# Altium PCB Pulp FMC Sensor Board_4X512Mbits_HyperRam.PcbDoc (part 2 of 2)
Units mm, origin at the board's own origin, x right, y up, seen from the top; angles counter-clockwise.
Board outline 62.85 x 58.85 mm, 4 copper layers (Top Layer, GND, PWR, Bottom Layer), stack 1.56 mm thick; 27 components, 33 nets, 302 pads, 158 vias.
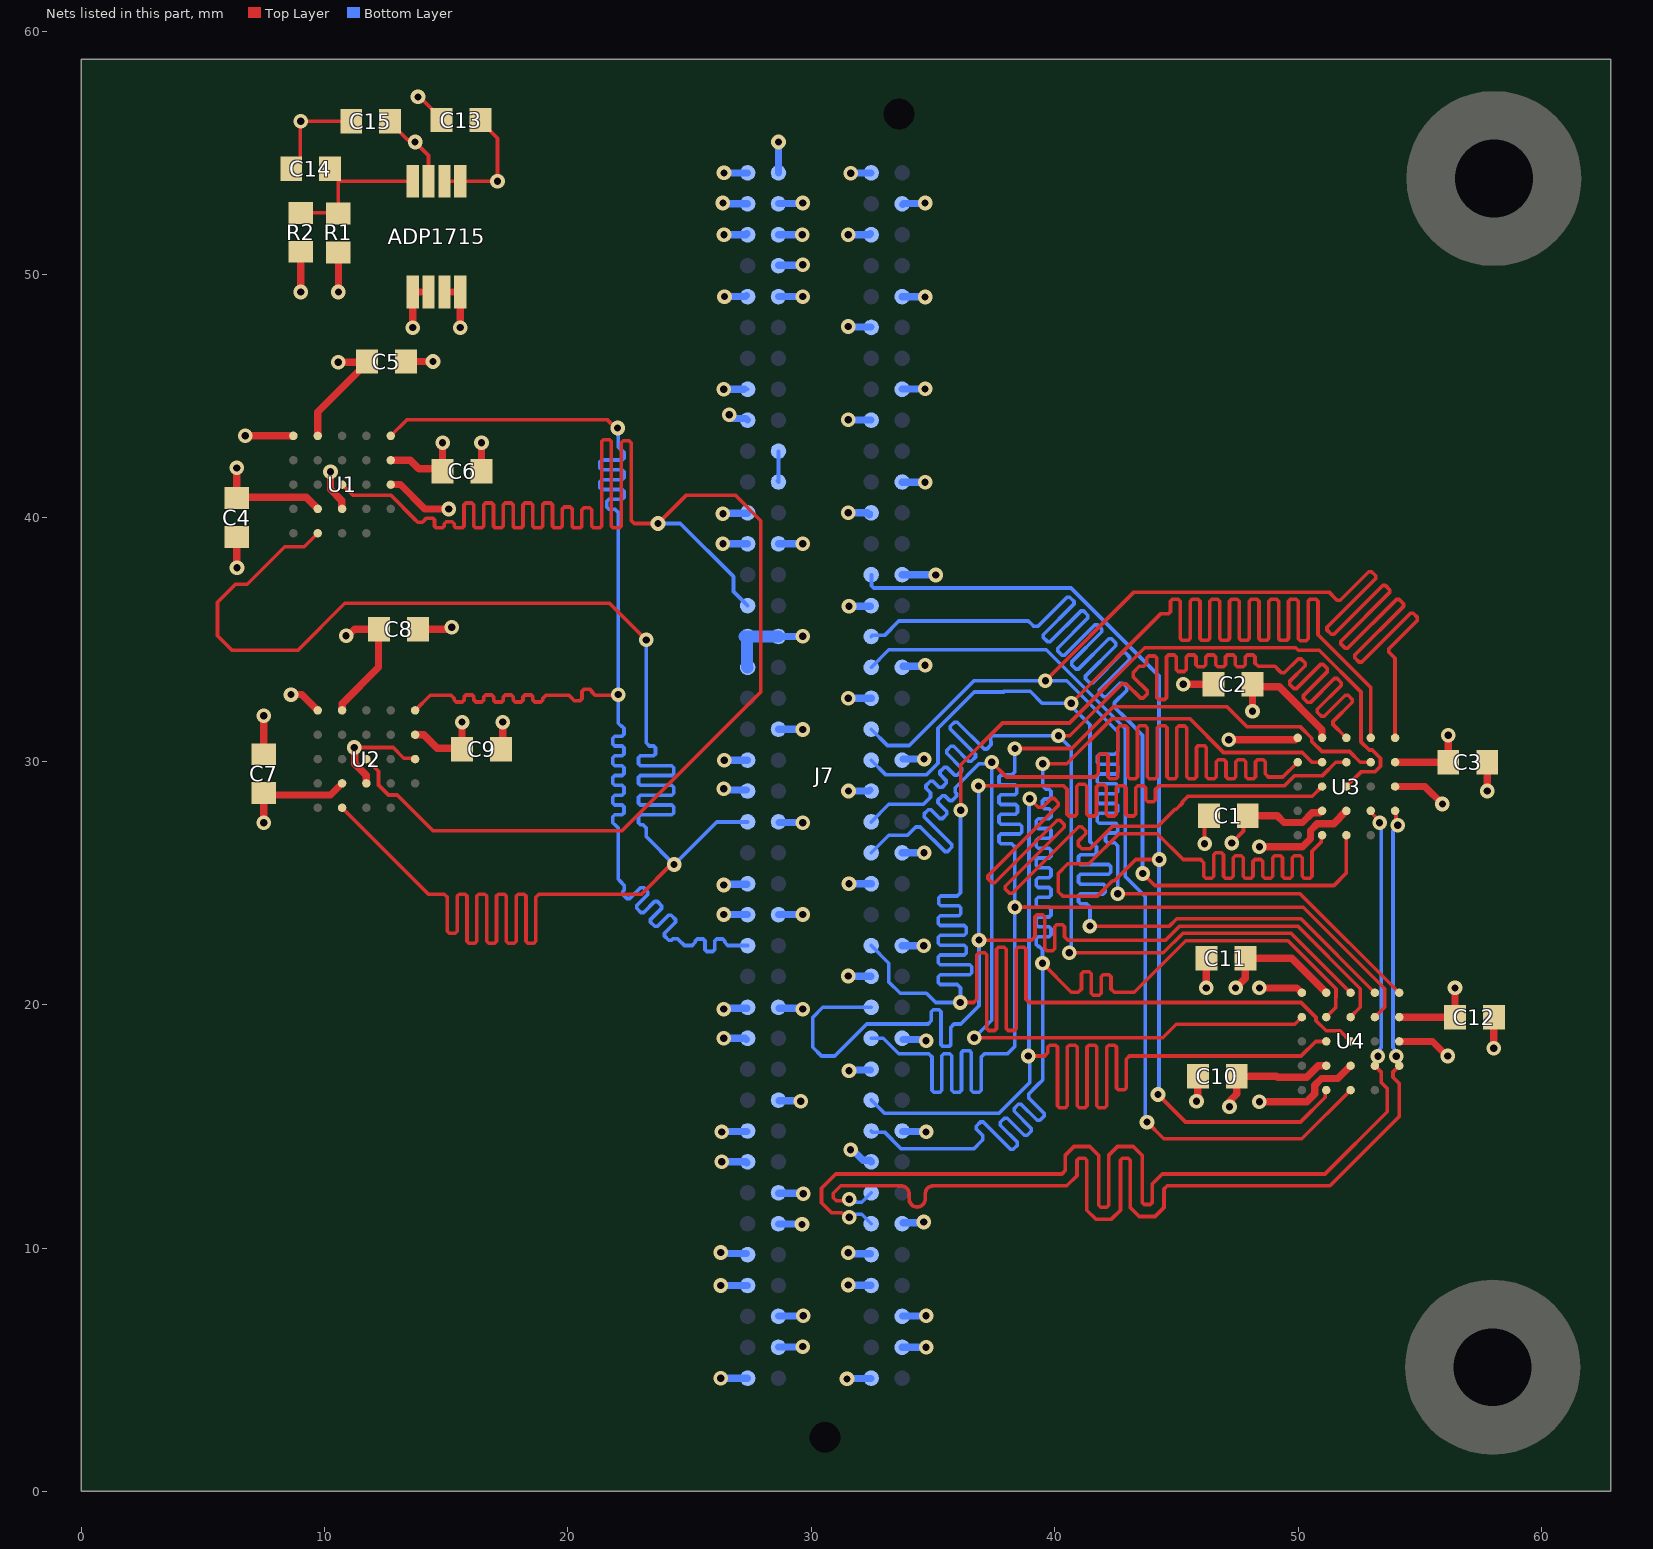
[diagram p4: the nets of this part, all layers, seen from the top]

## Via types
v1: diameter 0.6, hole 0.3, Top Layer to Bottom Layer, tented both sides, 156 vias
v2: diameter 0.6, hole 0.3, Top Layer to Bottom Layer, 2 vias

## Nets (pads, with @x,y where several pads share a name; then routed paths per layer and width w, separated by ;. In a path a pad name is that pad's centre, name@x,y a point inside that pad or via, vN(x,y) a via of type N, cw(c..) or ccw(c..) an arc to the next point about the centre after c; other vN are vias at no path point) (continued)
FMC_HYPER2_D7: J7.C15 U1.E1 U2.E1 | length 59.7
  Top Layer w0.15: U1.E1@12.716,43.375 13.372,44.032 21.628,44.032 21.96,43.7 v1(22.039,43.7) ; U2.E1@13.716,32.093 14.341,32.717 14.716,32.717 15.195,32.717 15.326,32.586 15.326,32.519 15.407,32.438 15.65,32.438 15.73,32.519 15.73,32.648 15.811,32.729 16.054,32.729 16.134,32.648 16.134,32.519 16.215,32.438 16.458,32.438 16.538,32.519 16.538,32.648 16.619,32.729 16.862,32.729 16.942,32.648 16.942,32.519 17.023,32.438 17.266,32.438 17.346,32.519 17.346,32.648 17.427,32.729 17.67,32.729 17.75,32.648 17.75,32.519 17.831,32.438 18.074,32.438 18.154,32.519 18.154,32.648 18.235,32.729 18.478,32.729 18.558,32.648 18.558,32.519 18.639,32.438 18.882,32.438 18.962,32.519 18.962,32.586 19.094,32.717 20.043,32.717 20.174,32.586 20.174,32.575 20.255,32.494 20.498,32.494 20.578,32.575 20.578,32.875 20.659,32.956 20.902,32.956 20.982,32.875 20.982,32.849 21.114,32.717 21.54,32.717 22.039,32.717 v1(22.065,32.743)
  Bottom Layer w0.15: v1(22.039,43.7) 22.065,43.674 22.065,42.992 22.065,42.917 22.197,42.785 22.219,42.785 22.3,42.705 22.3,42.462 22.219,42.381 21.396,42.381 21.315,42.301 21.315,42.058 21.396,41.977 22.219,41.977 22.3,41.897 22.3,41.654 22.219,41.573 21.396,41.573 21.315,41.493 21.315,41.25 21.396,41.169 22.219,41.169 22.3,41.089 22.3,40.846 22.219,40.765 21.68,40.765 21.599,40.685 21.599,40.442 21.68,40.361 21.933,40.361 22.065,40.23 22.065,39.028 v1(22.065,32.743) 22.065,31.965 22.065,31.568 22.197,31.436 22.219,31.436 22.3,31.356 22.3,31.113 22.219,31.032 21.921,31.032 21.84,30.952 21.84,30.709 21.921,30.628 22.219,30.628 22.3,30.548 22.3,30.305 22.219,30.224 21.921,30.224 21.84,30.144 21.84,29.901 21.921,29.82 22.219,29.82 22.3,29.74 22.3,29.497 22.219,29.416 21.921,29.416 21.84,29.336 21.84,29.093 21.921,29.012 22.219,29.012 22.3,28.932 22.3,28.689 22.219,28.608 21.921,28.608 21.84,28.528 21.84,28.285 21.921,28.204 22.219,28.204 22.3,28.124 22.3,27.881 22.219,27.8 21.921,27.8 21.84,27.72 21.84,27.477 21.921,27.396 21.933,27.396 22.065,27.265 22.065,27.19 22.065,25.149 22.135,25.079 22.316,24.898 22.316,24.712 22.251,24.646 22.251,24.532 22.423,24.361 22.537,24.361 22.988,24.812 23.103,24.812 23.274,24.641 23.274,24.527 22.823,24.075 22.823,23.961 22.994,23.789 23.108,23.789 23.56,24.241 23.674,24.241 23.845,24.07 23.845,23.955 23.394,23.504 23.394,23.39 23.565,23.218 23.68,23.218 24.131,23.67 24.245,23.67 24.417,23.498 24.417,23.384 23.965,22.932 23.965,22.818 24.137,22.647 24.251,22.647 24.316,22.712 24.502,22.712 24.556,22.659 24.784,22.43 25.021,22.43 25.096,22.43 25.227,22.562 25.227,22.619 25.308,22.7 25.551,22.7 25.631,22.619 25.631,22.266 25.712,22.185 25.955,22.185 26.035,22.266 26.035,22.619 26.116,22.7 26.359,22.7 26.439,22.619 26.439,22.562 26.571,22.43 26.8,22.43 J7.C15@27.38,22.43
FMC_HYPER2_RESET: J7.C19 U1.A4 U2.A4 | length 82.6
  Top Layer w0.15: U1.A4@9.716,39.375 9.158,38.817 8.366,38.817 6.823,37.275 6.337,37.275 5.596,36.534 5.596,35.165 6.202,34.559 8.89,34.559 10.832,36.5 21.703,36.5 v1(23.215,34.989) ; U2.A4@10.716,28.093 14.265,24.544 14.772,24.544 14.912,24.544 15.044,24.412 15.044,23.016 15.125,22.935 15.367,22.935 15.448,23.016 15.448,24.463 15.529,24.544 15.771,24.544 15.852,24.463 15.852,22.604 15.933,22.523 16.175,22.523 16.256,22.604 16.256,24.463 16.337,24.544 16.579,24.544 16.66,24.463 16.66,22.604 16.741,22.523 16.983,22.523 17.064,22.604 17.064,24.463 17.145,24.544 17.387,24.544 17.468,24.463 17.468,22.604 17.549,22.523 17.791,22.523 17.872,22.604 17.872,24.463 17.953,24.544 18.195,24.544 18.276,24.463 18.276,22.604 18.357,22.523 18.599,22.523 18.68,22.604 18.68,24.412 18.812,24.544 18.887,24.544 23.019,24.544 24.238,25.763 v1(24.36,25.763)
  Bottom Layer w0.15: v1(23.215,34.989) 23.215,30.89 23.215,30.76 23.347,30.628 23.517,30.628 23.597,30.548 23.597,30.305 23.517,30.224 22.981,30.224 22.9,30.144 22.9,29.901 22.981,29.82 24.265,29.82 24.346,29.74 24.346,29.497 24.265,29.416 22.981,29.416 22.9,29.336 22.9,29.093 22.981,29.012 24.265,29.012 24.346,28.932 24.346,28.689 24.265,28.608 22.981,28.608 22.9,28.528 22.9,28.285 22.981,28.204 24.265,28.204 24.346,28.124 24.346,27.881 24.265,27.8 22.981,27.8 22.9,27.72 22.9,27.477 22.981,27.396 23.083,27.396 23.215,27.265 23.215,27.19 23.215,26.908 v1(24.36,25.763) 24.362,25.763 26.11,27.51 J7.C19@27.38,27.51
FMC_HYPER2_RWDS: J7.C26 U1.C3 U2.C3 | length 78.1
  Top Layer w0.15: U1.C3@10.716,41.375 11.15,40.941 12.716,40.941 13.716,39.941 13.832,39.825 14.018,39.825 14.19,39.996 14.432,39.996 14.513,39.915 14.513,39.673 14.594,39.592 14.836,39.592 14.917,39.673 14.917,39.765 14.998,39.846 15.24,39.846 15.321,39.765 15.321,39.673 15.402,39.592 15.644,39.592 15.725,39.673 15.725,40.533 15.806,40.614 16.048,40.614 16.129,40.533 16.129,39.673 16.21,39.592 16.452,39.592 16.533,39.673 16.533,40.533 16.614,40.614 16.856,40.614 16.937,40.533 16.937,39.673 17.018,39.592 17.26,39.592 17.341,39.673 17.341,40.533 17.422,40.614 17.664,40.614 17.745,40.533 17.745,39.673 17.826,39.592 18.068,39.592 18.149,39.673 18.149,40.533 18.23,40.614 18.472,40.614 18.553,40.533 18.553,39.673 18.634,39.592 18.876,39.592 18.957,39.673 18.957,40.533 19.038,40.614 19.28,40.614 19.361,40.533 19.361,39.673 19.442,39.592 19.684,39.592 19.765,39.673 19.765,40.374 19.846,40.454 20.088,40.454 20.169,40.374 20.169,39.673 20.25,39.592 20.492,39.592 20.573,39.673 20.573,40.335 20.654,40.416 20.896,40.416 20.977,40.335 20.977,39.673 21.058,39.592 21.3,39.592 21.381,39.673 21.381,43.131 21.462,43.212 21.704,43.212 21.785,43.131 21.785,39.673 21.866,39.592 22.108,39.592 22.189,39.673 22.189,43.094 22.27,43.175 22.512,43.175 22.593,43.094 22.593,39.907 22.725,39.775 23.215,39.775 v1(23.7,39.775) 24.866,40.941 26.871,40.941 27.925,39.887 27.925,32.851 22.224,27.15 14.456,27.15 12.988,28.618 12.625,28.618 12.216,29.027 12.216,29.593 U2.C3@11.716,30.093
  Bottom Layer w0.15: v1(23.7,39.775) 24.616,39.775 26.8,37.591 26.8,36.98 J7.C26@27.38,36.4
FMC_HYPER_CK_N: J7.G7 U3.B1 U4.B1 | length 49.2
  Top Layer w0.15: v1(31.555,12.01) 31.483,11.938 31.03,11.938 30.906,12.062 30.906,12.256 31.204,12.554 32.959,12.554 33.692,12.554 cw(c33.692,12.225) 34.021,12.225 34.021,12.016 ccw(c34.35,12.016) 34.35,11.687 ccw(c34.35,12.016) 34.679,12.016 34.679,12.225 cw(c35.008,12.225) 35.008,12.554 36.35,12.554 40.079,12.554 40.5,12.554 40.919,12.972 40.919,13.603 41,13.684 41.242,13.684 41.323,13.603 41.323,11.556 41.69,11.189 42.338,11.189 42.706,11.556 42.706,13.603 42.787,13.684 43.029,13.684 43.11,13.603 43.11,11.666 43.477,11.298 44.125,11.298 44.493,11.666 44.493,12.422 44.625,12.554 47.39,12.554 51.311,12.554 54.159,15.403 54.159,16.759 53.904,17.014 53.904,17.234 U4.B1@54.159,17.489 54.121,17.527 54.121,17.668 54.034,17.755 v1(54.034,17.877) ; U3.B1@53.988,27.965 54.026,27.927 54.026,27.439 v1(54.095,27.371)
  Bottom Layer w0.15: v1(31.555,12.01) 31.67,12.01 31.8,11.88 32.07,11.88 J7.G7@32.46,12.27 ; v1(54.034,17.877) 53.948,17.963 53.948,18.189 53.904,18.234 53.904,27.144 54.095,27.334 v1(54.095,27.371)
FMC_HYPER_CK_P: J7.G6 U3.B2 U4.B2 | length 48.9
  Top Layer w0.15: v1(31.555,11.26) 31.434,11.26 31.245,11.448 30.828,11.448 30.417,11.859 30.417,12.459 31.001,13.043 40.079,13.043 40.298,13.043 40.429,13.175 40.429,13.806 40.797,14.174 41.445,14.174 41.812,13.806 41.812,11.759 41.893,11.678 42.136,11.678 42.216,11.759 42.216,13.806 42.584,14.174 43.232,14.174 43.599,13.806 43.599,11.868 43.68,11.788 43.922,11.788 44.003,11.868 44.003,12.625 44.422,13.043 47.39,13.043 51.108,13.043 53.67,15.605 53.67,16.556 53.414,16.811 53.414,17.234 U4.B2@53.159,17.489 53.197,17.527 53.197,17.668 53.284,17.755 v1(53.284,17.877) ; U3.B2@52.988,27.965 52.988,27.911 53.352,27.547 v1(53.352,27.473)
  Bottom Layer w0.15: v1(31.555,11.26) 31.67,11.26 31.8,11.39 32.07,11.39 J7.G6@32.46,11 ; v1(53.284,17.877) 53.37,17.963 53.37,18.189 53.414,18.234 53.414,27.41 v1(53.352,27.473)
FMC_HYPER_CSN0: J7.G24 U4.A3 | length 38.1
  Top Layer w0.15: v1(43.795,15.177) 44.482,14.489 50.159,14.489 U4.A3@52.159,16.489
  Bottom Layer w0.15: J7.G24@32.46,33.86 33.185,34.585 39.652,34.585 42.898,31.339 42.898,25.264 43.721,24.442 43.721,21.949 43.721,16.759 43.721,15.251 v1(43.795,15.177)
FMC_HYPER_CSN1: J7.G25 U3.A3 | length 49.3
  Top Layer w0.15: v1(43.614,25.39) 44.108,24.897 51.476,24.897 51.988,25.409 U3.A3@51.988,26.965
  Bottom Layer w0.15: J7.G25@32.46,35.13 32.506,35.176 33.005,35.176 33.597,35.767 38.918,35.767 39.076,35.61 39.129,35.557 39.315,35.557 40.507,36.749 40.622,36.749 40.793,36.577 40.793,36.463 39.536,35.206 39.536,35.092 39.707,34.92 39.822,34.92 41.079,36.177 41.193,36.177 41.364,36.006 41.364,35.892 40.124,34.651 40.124,34.537 40.295,34.366 40.41,34.366 41.65,35.606 41.764,35.606 41.936,35.435 41.936,35.32 40.695,34.08 40.695,33.966 40.867,33.794 40.981,33.794 42.221,35.035 42.336,35.035 42.507,34.863 42.507,34.749 41.267,33.509 41.267,33.394 41.438,33.223 41.552,33.223 42.793,34.463 42.907,34.463 43.078,34.292 43.078,34.178 41.838,32.937 41.838,32.823 42.009,32.651 42.124,32.651 42.684,33.212 42.798,33.212 42.969,33.04 42.969,32.926 42.458,32.414 42.458,32.228 42.928,31.757 43.611,31.075 43.611,25.393 v1(43.614,25.39)
FMC_HYPER_D0: J7.G13 U3.D3 U4.D3 | length 71.3
  Top Layer w0.15: v1(36.866,28.99) 39.897,28.99 40.376,28.99 40.508,28.858 40.508,27.837 40.589,27.756 40.831,27.756 40.912,27.837 40.912,28.973 40.993,29.054 41.235,29.054 41.316,28.973 41.316,27.837 41.397,27.756 41.639,27.756 41.72,27.837 41.72,28.95 41.801,29.031 42.043,29.031 42.124,28.95 42.124,27.837 42.205,27.756 42.447,27.756 42.528,27.837 42.528,28.909 42.609,28.99 42.851,28.99 42.932,28.909 42.932,27.837 43.013,27.756 43.255,27.756 43.336,27.837 43.336,28.909 43.417,28.99 43.659,28.99 43.74,28.909 43.74,28.418 43.821,28.337 44.063,28.337 44.144,28.418 44.144,28.858 44.276,28.99 45.264,28.99 49.437,28.99 49.862,29.415 51.004,29.415 51.554,29.965 U3.D3@51.988,29.965 ; v1(36.89,22.655) 38.984,22.655 39.059,22.655 39.19,22.786 39.19,23.619 39.271,23.7 39.514,23.7 39.594,23.619 39.594,22.304 39.675,22.223 39.918,22.223 39.998,22.304 39.998,23.204 40.079,23.284 40.322,23.284 40.402,23.204 40.402,22.786 40.534,22.655 41.092,22.655 44.564,22.655 45.139,23.23 49.984,23.23 52.559,20.655 52.559,19.889 U4.D3@52.159,19.489
  Bottom Layer w0.15: J7.G13@32.46,19.89 30.472,19.89 30.055,19.473 30.055,18.251 30.417,17.889 30.958,17.889 32.277,19.208 34.721,19.208 34.796,19.208 34.928,19.34 34.928,19.708 35.008,19.789 35.251,19.789 35.332,19.708 35.332,18.366 35.412,18.285 35.655,18.285 35.736,18.366 35.736,19.076 35.868,19.208 36.142,19.208 36.89,19.956 v1(36.89,22.655) 36.878,22.667 36.878,28.978 v1(36.866,28.99)
FMC_HYPER_D1: J7.G12 U3.D2 U4.D2 | length 67.3
  Top Layer w0.15: v1(38.366,24) 38.747,24 ccw(c38.747,24.015) 38.763,24.015 cw(c38.779,24.015) 38.795,24.015 ccw(c38.811,24.015) 38.811,24 50.214,24 53.559,20.655 53.559,19.889 U4.D2@53.159,19.489 ; v1(38.366,30.525) 40.7,30.525 42.418,32.244 47.083,32.244 47.912,31.415 50.104,31.415 50.57,30.949 50.57,30.817 50.986,30.401 52.117,30.401 52.554,29.965 U3.D2@52.988,29.965
  Bottom Layer w0.15: J7.G12@32.46,18.62 32.959,18.62 33.594,17.985 34.35,17.985 34.829,17.985 34.961,17.853 34.961,16.478 35.042,16.398 35.284,16.398 35.365,16.478 35.365,17.904 35.446,17.985 35.688,17.985 35.769,17.904 35.769,16.478 35.85,16.398 36.092,16.398 36.173,16.478 36.173,18.032 36.254,18.113 36.496,18.113 36.577,18.032 36.577,16.478 36.658,16.398 36.9,16.398 36.981,16.478 36.981,17.853 37.113,17.985 37.839,17.985 38.061,17.985 38.366,18.29 v1(38.366,24) 38.366,26.404 38.366,26.479 38.235,26.61 37.796,26.61 37.715,26.691 37.715,26.934 37.796,27.014 38.565,27.014 38.646,27.095 38.646,27.338 38.565,27.418 37.796,27.418 37.715,27.499 37.715,27.742 37.796,27.822 38.389,27.822 38.47,27.903 38.47,28.146 38.389,28.226 37.796,28.226 37.715,28.307 37.715,28.55 37.796,28.63 38.368,28.63 38.449,28.711 38.449,28.954 38.368,29.034 37.796,29.034 37.715,29.115 37.715,29.358 37.796,29.438 38.235,29.438 38.366,29.57 38.366,29.706 v1(38.366,30.525)
FMC_HYPER_D2: J7.G10 U3.C4 U4.C4 | length 80
  Top Layer w0.15: v1(38.918,17.889) 39.507,17.889 39.582,17.889 39.714,18.021 39.714,18.257 39.795,18.338 40.037,18.338 40.118,18.257 40.118,15.843 40.199,15.762 40.441,15.762 40.522,15.843 40.522,18.257 40.603,18.338 40.845,18.338 40.926,18.257 40.926,15.843 41.007,15.762 41.249,15.762 41.33,15.843 41.33,18.257 41.411,18.338 41.653,18.338 41.734,18.257 41.734,15.843 41.815,15.762 42.057,15.762 42.138,15.843 42.138,18.257 42.219,18.338 42.461,18.338 42.542,18.257 42.542,16.58 42.623,16.499 42.865,16.499 42.946,16.58 42.946,17.757 43.078,17.889 43.75,17.889 50.125,17.889 50.725,18.489 U4.C4@51.159,18.489 ; v1(38.974,28.465) 39.269,28.17 39.322,28.117 39.508,28.117 39.865,28.474 39.979,28.474 40.151,28.302 40.151,28.188 37.257,25.294 37.257,25.18 37.429,25.009 37.543,25.009 40.108,27.574 40.222,27.574 40.394,27.403 40.394,27.288 37.973,24.867 37.973,24.753 38.144,24.582 38.259,24.582 40.992,27.315 41.106,27.315 41.278,27.144 41.278,27.03 40.976,26.728 40.976,26.541 41.108,26.41 41.284,26.41 41.45,26.41 42.372,27.332 44.246,27.332 44.949,28.035 44.995,28.035 45.252,28.292 45.252,28.338 45.479,28.565 50.588,28.565 U3.C4@50.988,28.965
  Bottom Layer w0.15: J7.G10@32.46,16.08 33.005,15.535 37.71,15.535 38.974,16.799 38.974,17.833 v1(38.918,17.889) 38.946,17.917 38.946,28.437 v1(38.974,28.465)
FMC_HYPER_D3: J7.G9 U3.D4 U4.D4 | length 67.8
  Top Layer w0.15: v1(39.501,21.698) 40.687,20.512 40.895,20.512 40.97,20.512 41.102,20.644 41.102,21.273 41.183,21.354 41.425,21.354 41.506,21.273 41.506,20.47 41.587,20.389 41.829,20.389 41.91,20.47 41.91,21.153 41.991,21.234 42.233,21.234 42.314,21.153 42.314,20.644 42.446,20.512 43.27,20.512 45.388,22.63 49.584,22.63 51.559,20.655 51.559,20.299 51.556,20.296 51.556,19.886 U4.D4@51.159,19.489 ; v1(39.507,29.899) 40.498,29.899 42.356,31.757 45.548,31.757 46.94,30.365 50.178,30.365 50.578,29.965 U3.D4@50.988,29.965
  Bottom Layer w0.15: J7.G9@32.46,14.81 32.506,14.764 33.005,14.764 33.684,14.085 36.684,14.085 36.988,14.389 37.041,14.442 37.041,14.629 36.778,14.892 36.778,15.006 36.949,15.178 37.063,15.178 38.184,14.058 38.298,14.058 38.469,14.229 38.469,14.343 37.763,15.05 37.763,15.164 37.934,15.335 38.049,15.335 38.755,14.629 38.869,14.629 39.041,14.8 39.041,14.915 38.334,15.621 38.334,15.735 38.506,15.907 38.62,15.907 39.279,15.247 39.394,15.247 39.565,15.419 39.565,15.533 38.942,16.156 38.942,16.343 39.279,16.68 39.507,16.908 39.507,21.691 v1(39.501,21.698) 39.501,22.185 39.501,22.26 39.369,22.392 39.327,22.392 39.246,22.473 39.246,22.715 39.327,22.796 39.77,22.796 39.851,22.877 39.851,23.119 39.77,23.2 39.327,23.2 39.246,23.281 39.246,23.523 39.327,23.604 39.77,23.604 39.851,23.685 39.851,23.927 39.77,24.008 39.327,24.008 39.246,24.089 39.246,24.331 39.327,24.412 39.77,24.412 39.851,24.493 39.851,24.735 39.77,24.816 39.327,24.816 39.246,24.897 39.246,25.139 39.327,25.22 39.77,25.22 39.851,25.301 39.851,25.543 39.77,25.624 39.327,25.624 39.246,25.705 39.246,25.947 39.327,26.028 39.77,26.028 39.851,26.109 39.851,26.351 39.77,26.432 39.327,26.432 39.246,26.513 39.246,26.755 39.327,26.836 39.77,26.836 39.851,26.917 39.851,27.159 39.77,27.24 39.327,27.24 39.246,27.321 39.246,27.563 39.327,27.644 39.77,27.644 39.851,27.725 39.851,27.967 39.77,28.048 39.58,28.048 39.499,28.129 39.499,28.371 39.58,28.452 39.77,28.452 39.851,28.533 39.851,28.775 39.77,28.856 39.639,28.856 39.507,28.988 39.507,29.004 39.507,29.079 v1(39.507,29.899)
FMC_HYPER_D4: J7.G18 U3.D5 U4.D5 | length 74.7
  Top Layer w0.15: v1(36.696,18.638) 44.439,18.638 44.996,19.194 49.864,19.194 U4.D5@50.159,19.489 ; v1(37.415,29.965) 37.415,29.964 38.025,29.354 41.222,29.354 41.658,29.354 41.79,29.486 41.79,30.227 41.871,30.307 42.113,30.307 42.194,30.227 42.194,29.371 42.275,29.29 42.517,29.29 42.598,29.371 42.598,31.376 42.679,31.457 42.921,31.457 43.002,31.376 43.002,29.371 43.083,29.29 43.325,29.29 43.406,29.371 43.406,31.376 43.487,31.457 43.729,31.457 43.81,31.376 43.81,29.371 43.891,29.29 44.133,29.29 44.214,29.371 44.214,31.376 44.295,31.457 44.537,31.457 44.618,31.376 44.618,29.371 44.699,29.29 44.941,29.29 45.022,29.371 45.022,31.374 45.103,31.454 45.345,31.454 45.426,31.374 45.426,29.371 45.507,29.29 45.749,29.29 45.83,29.371 45.83,30.566 45.911,30.646 46.153,30.646 46.234,30.566 46.234,29.371 46.315,29.29 46.557,29.29 46.638,29.371 46.638,29.984 46.719,30.065 46.961,30.065 47.042,29.984 47.042,29.371 47.123,29.29 47.365,29.29 47.446,29.371 47.446,29.984 47.527,30.065 47.769,30.065 47.85,29.984 47.85,29.371 47.931,29.29 48.173,29.29 48.254,29.371 48.254,29.984 48.335,30.065 48.577,30.065 48.658,29.984 48.658,29.486 48.79,29.354 49.377,29.354 49.945,29.922 U3.D5@49.988,29.965
  Bottom Layer w0.15: J7.G18@32.46,26.24 33.185,26.965 33.956,26.965 34.294,27.304 34.481,27.304 35.49,26.294 35.605,26.294 35.776,26.465 35.776,26.58 34.634,27.722 34.634,27.836 34.805,28.008 34.92,28.008 35.275,27.653 35.389,27.653 35.56,27.824 35.56,27.938 35.205,28.293 35.205,28.408 35.377,28.579 35.491,28.579 35.682,28.388 35.796,28.388 35.967,28.56 35.967,28.674 35.909,28.732 35.909,28.918 36.873,29.882 36.89,29.899 37.349,29.899 v1(37.415,29.965) 37.415,19.357 v1(36.696,18.638)
FMC_HYPER_D5: J7.G19 U3.E3 U4.E3 | length 71.8
  Top Layer w0.15: v1(40.155,31.05) 40.625,31.05 40.705,31.13 42.758,33.182 42.944,33.182 43.525,32.601 43.639,32.601 43.811,32.772 43.811,32.887 43.23,33.468 43.23,33.654 43.478,33.903 43.581,33.903 43.656,33.903 43.788,34.034 43.788,34.251 43.869,34.331 44.111,34.331 44.192,34.251 44.192,32.625 44.273,32.544 44.515,32.544 44.596,32.625 44.596,34.29 44.677,34.37 44.919,34.37 45,34.29 45,33.771 45.081,33.69 45.323,33.69 45.404,33.771 45.404,34.29 45.485,34.37 45.727,34.37 45.808,34.29 45.808,33.971 45.889,33.89 46.131,33.89 46.212,33.971 46.212,34.29 46.293,34.37 46.535,34.37 46.616,34.29 46.616,33.971 46.697,33.89 46.939,33.89 47.02,33.971 47.02,34.29 47.101,34.37 47.343,34.37 47.424,34.29 47.424,33.971 47.505,33.89 47.747,33.89 47.828,33.971 47.828,34.29 47.909,34.37 48.151,34.37 48.232,34.29 48.232,34.034 48.364,33.903 48.83,33.903 49.05,33.903 49.263,33.69 49.316,33.637 49.44,33.637 50.012,34.209 50.126,34.209 50.298,34.037 50.298,33.923 49.654,33.279 49.654,33.165 49.825,32.993 49.939,32.993 50.923,33.977 51.038,33.977 51.209,33.806 51.209,33.692 50.225,32.708 50.225,32.594 50.396,32.422 50.511,32.422 51.495,33.406 51.609,33.406 51.78,33.235 51.78,33.12 50.796,32.136 50.796,32.022 50.968,31.851 51.082,31.851 51.945,32.714 52.059,32.714 52.231,32.542 52.231,32.428 51.44,31.637 51.44,31.513 51.944,31.009 U3.E3@51.988,30.965 ; v1(40.6,22.13) 44.464,22.13 45.264,22.93 49.719,22.93 U4.E3@52.159,20.489
  Bottom Layer w0.15: J7.G19@32.46,27.51 33.185,28.235 34.608,28.235 34.845,28.472 34.898,28.525 34.898,28.711 34.715,28.894 34.715,29.008 34.886,29.18 35.001,29.18 35.252,28.928 35.366,28.928 35.538,29.1 35.538,29.214 35.286,29.465 35.286,29.58 35.458,29.751 35.572,29.751 35.888,29.435 36.002,29.435 36.173,29.607 36.173,29.721 35.562,30.332 35.562,30.446 35.734,30.618 35.848,30.618 36.459,30.007 36.573,30.007 36.745,30.178 36.745,30.292 35.712,31.325 35.712,31.44 35.883,31.611 35.997,31.611 37.101,30.508 37.215,30.508 37.387,30.679 37.387,30.793 37.37,30.81 37.37,30.996 37.423,31.05 v1(40.155,31.05) 40.68,30.525 40.68,22.21 v1(40.6,22.13)
FMC_HYPER_D6: J7.G21 U3.E2 U4.E2 | length 80.1
  Top Layer w0.15: v1(40.68,32.39) 44.349,36.059 44.596,36.059 44.671,36.059 44.759,36.146 44.759,36.575 44.84,36.655 45.082,36.655 45.163,36.575 45.163,35.051 45.244,34.97 45.486,34.97 45.567,35.051 45.567,36.575 45.648,36.655 45.89,36.655 45.971,36.575 45.971,35.051 46.052,34.97 46.294,34.97 46.375,35.051 46.375,36.575 46.456,36.655 46.698,36.655 46.779,36.575 46.779,35.051 46.86,34.97 47.102,34.97 47.183,35.051 47.183,36.575 47.264,36.655 47.506,36.655 47.587,36.575 47.587,35.051 47.668,34.97 47.91,34.97 47.991,35.051 47.991,36.575 48.072,36.655 48.314,36.655 48.395,36.575 48.395,35.051 48.476,34.97 48.718,34.97 48.799,35.051 48.799,36.575 48.88,36.655 49.122,36.655 49.203,36.575 49.203,35.051 49.284,34.97 49.526,34.97 49.607,35.051 49.607,36.575 49.688,36.655 49.93,36.655 50.011,36.575 50.011,35.033 50.092,34.952 50.334,34.952 50.415,35.033 50.415,36.575 50.496,36.655 50.738,36.655 50.819,36.575 50.819,35.206 50.937,35.088 52.988,33.037 U3.E2@52.988,30.965 ; v1(41.45,23.23) 44.715,23.23 45.015,23.53 50.119,23.53 U4.E2@53.159,20.489
  Bottom Layer w0.15: J7.G21@32.46,30.05 33.067,29.443 34.726,29.443 35.205,29.923 35.205,31.358 36.699,32.851 37.896,32.851 37.919,32.875 38.999,32.875 39.484,32.39 v1(40.68,32.39) 40.68,32.268 41.45,31.498 41.45,27.756 41.45,26.703 41.582,26.571 41.638,26.571 41.719,26.49 41.719,26.248 41.638,26.167 41.061,26.167 40.98,26.086 40.98,25.844 41.061,25.763 42.217,25.763 42.298,25.682 42.298,25.44 42.217,25.359 41.061,25.359 40.98,25.278 40.98,25.036 41.061,24.955 41.992,24.955 42.073,24.874 42.073,24.632 41.992,24.551 41.061,24.551 40.98,24.47 40.98,24.228 41.061,24.147 41.318,24.147 41.45,24.015 41.45,23.94 v1(41.45,23.23)
FMC_HYPER_D7: J7.G22 U3.E1 U4.E1 | length 80.2
  Top Layer w0.15: v1(39.62,33.315) 43.26,36.955 51.271,36.955 51.554,36.673 51.607,36.62 51.731,36.62 52.906,37.796 53.021,37.796 53.192,37.624 53.192,37.51 51.192,35.51 51.192,35.396 51.364,35.225 51.478,35.225 53.478,37.224 53.592,37.224 53.763,37.053 53.763,36.939 51.764,34.939 51.764,34.825 51.935,34.653 52.049,34.653 54.049,36.653 54.163,36.653 54.335,36.482 54.335,36.367 52.335,34.368 52.335,34.253 52.506,34.082 52.621,34.082 54.62,36.082 54.735,36.082 54.906,35.91 54.906,35.796 53.731,34.62 53.731,34.496 53.935,34.292 53.988,34.239 U3.E1@53.988,30.965 ; v1(42.598,24.563) 50.086,24.563 U4.E1@54.159,20.489
  Bottom Layer w0.15: J7.G22@32.46,31.32 33.129,30.651 34.023,30.651 36.688,33.315 v1(39.62,33.315) 40.497,33.315 42.598,31.214 42.598,30.899 42.598,30.42 42.466,30.288 41.831,30.288 41.75,30.207 41.75,29.965 41.831,29.884 42.517,29.884 42.598,29.803 42.598,29.561 42.517,29.48 41.831,29.48 41.75,29.399 41.75,29.157 41.831,29.076 42.517,29.076 42.598,28.995 42.598,28.753 42.517,28.672 41.831,28.672 41.75,28.591 41.75,28.349 41.831,28.268 42.517,28.268 42.598,28.187 42.598,27.945 42.517,27.864 41.831,27.864 41.75,27.783 41.75,27.541 41.831,27.46 42.517,27.46 42.598,27.379 42.598,27.137 42.517,27.056 42.17,27.056 42.09,26.975 42.09,26.733 42.17,26.652 42.466,26.652 42.598,26.52 42.598,25.23 v1(42.598,24.563)
FMC_HYPER_RESET: J7.G27 U3.A4 U4.A4 | length 67
  Top Layer w0.15: v1(44.246,16.308) 45.377,15.177 50.102,15.177 51.121,16.196 51.121,16.451 U4.A4@51.159,16.489 ; v1(44.301,25.965) 43.333,25.965 42.455,25.088 42.381,25.088 41.756,24.463 40.329,24.463 40.151,24.641 40.151,25.395 40.543,25.786 41.404,25.786 42.647,27.03 44.219,27.03 45.283,25.965 45.518,25.965 45.997,25.965 46.129,25.833 46.129,25.277 46.21,25.197 46.452,25.197 46.533,25.277 46.533,26.163 46.614,26.244 46.856,26.244 46.937,26.163 46.937,25.277 47.018,25.197 47.26,25.197 47.341,25.277 47.341,26.039 47.422,26.12 47.664,26.12 47.745,26.039 47.745,25.277 47.826,25.197 48.068,25.197 48.149,25.277 48.149,25.884 48.23,25.965 48.472,25.965 48.553,25.884 48.553,25.277 48.634,25.197 48.876,25.197 48.957,25.277 48.957,26.034 49.038,26.115 49.28,26.115 49.361,26.034 49.361,25.277 49.442,25.197 49.684,25.197 49.765,25.277 49.765,26.034 49.846,26.115 50.088,26.115 50.169,26.034 50.169,25.277 50.25,25.197 50.492,25.197 50.573,25.277 50.573,26.307 50.933,26.667 50.95,26.684 50.95,26.927 U3.A4@50.988,26.965
  Bottom Layer w0.15: J7.G27@32.46,37.67 32.474,37.656 32.474,37.213 32.561,37.125 40.669,37.125 44.285,33.51 44.285,25.981 v1(44.301,25.965) ; v1(44.246,16.308) 44.285,16.347 v1@44.285,25.965
FMC_HYPER_RWDS: J7.G15 U3.C3 U4.C3 | length 83.2
  Top Layer w0.15: v1(36.124,20.089) 36.595,20.089 36.67,20.089 36.801,20.221 36.801,22.049 36.882,22.13 37.125,22.13 37.205,22.049 37.205,19.018 37.286,18.938 37.529,18.938 37.609,19.018 37.609,22.274 37.69,22.355 37.933,22.355 38.013,22.274 38.013,19.018 38.094,18.938 38.337,18.938 38.417,19.018 38.417,22.274 38.498,22.355 38.741,22.355 38.821,22.274 38.821,20.221 38.953,20.089 40.446,20.089 50.125,20.089 50.741,19.473 50.741,19.342 51.157,18.925 51.723,18.925 U4.C3@52.159,18.489 ; v1(36.142,27.993) 36.142,29.859 37.858,31.575 40.608,31.575 43.703,34.67 49.907,34.67 50.011,34.566 50.873,34.566 52.588,32.851 52.588,30.799 52.922,30.465 53.054,30.465 53.388,30.131 53.388,29.799 53.154,29.565 52.588,29.565 U3.C3@51.988,28.965
  Bottom Layer w0.15: J7.G15@32.46,22.43 33.185,21.705 33.185,20.934 33.65,20.469 34.73,20.469 35.11,20.089 v1(36.124,20.089) 36.133,20.098 36.133,20.623 36.133,20.698 36.001,20.83 35.296,20.83 35.215,20.911 35.215,21.153 35.296,21.234 36.509,21.234 36.59,21.315 36.59,21.557 36.509,21.638 35.296,21.638 35.215,21.719 35.215,21.961 35.296,22.042 36.284,22.042 36.365,22.123 36.365,22.365 36.284,22.446 35.296,22.446 35.215,22.527 35.215,22.769 35.296,22.85 36.284,22.85 36.365,22.931 36.365,23.173 36.284,23.254 35.296,23.254 35.215,23.335 35.215,23.577 35.296,23.658 36.065,23.658 36.146,23.739 36.146,23.981 36.065,24.062 35.319,24.062 35.238,24.143 35.238,24.385 35.319,24.466 36.001,24.466 36.133,24.598 36.133,25.739 36.133,27.984 v1(36.142,27.993)
GND: ADP1715.5 ADP1715.6 ADP1715.7 ADP1715.8 C1.1 C2.1 C3.1 C4.1 C5.1 C6.1 C7.1 C8.1 C9.1 C10.1 C11.1 C12.1 C13.2 C14.1 C15.1 J7.C1 J7.C4 J7.C5 J7.C8 J7.C9 J7.C12 J7.C13 J7.C16 J7.C17 J7.C20 J7.C21 J7.C24 J7.C25 J7.C28 J7.C29 J7.C32 J7.C33 J7.C36 J7.C38 J7.C40 J7.D2 J7.D3 J7.D6 J7.D7 J7.D10 J7.D13 J7.D16 J7.D19 J7.D22 J7.D25 J7.D28 J7.D37 J7.D39 J7.G1 J7.G4 J7.G5 J7.G8 J7.G11 J7.G14 J7.G17 J7.G20 J7.G23 J7.G26 J7.G29 J7.G32 J7.G35 J7.G38 J7.G40 J7.H2 J7.H3 J7.H6 J7.H9 J7.H12 J7.H15 J7.H18 J7.H21 J7.H24 J7.H27 J7.H30 J7.H33 J7.H36 J7.H39 R2.1 U1.B3 U1.C1 U1.E5 U2.B3 U2.C1 U2.E5 U3.B3 U3.C1 U3.E5 U4.B3 U4.C1 U4.E5 | length 118.9
  Top Layer w0.15: C14.1@8.626,54.358 9.001,54.733 9.001,56.291 v2(9.016,56.305) C15.1@11.092,56.305 ; v1(11.216,30.568) 12.816,30.568 13.253,30.131 13.677,30.131 U2.C1@13.716,30.093 ; v2(13.835,57.303) 13.905,57.303 14.804,56.405 C13.2@14.804,56.355 ; v1@16.447,42.992 v1(16.447,43.09) ; C9.1@17.247,30.493 C9.1@17.322,30.568 ; v1(45.83,16.028) 45.83,16.08 v1@45.882,16.132 ; v1(46.16,26.616) 46.16,27.595 C1.1@46.335,27.77 ; C11.1@46.227,21.897 C11.1@46.235,21.905 ; v1@56.125,17.889 v1(56.15,17.889)
  Top Layer w0.3: v1@6.392,37.964 C4.1@6.392,39.22 ; v1(6.742,43.375) U1.E5@8.716,43.375 ; C7.1@7.492,30.293 v1(7.492,31.879) ; v1(8.616,32.743) 9.065,32.743 U2.E5@9.716,32.093 ; v1(9.016,49.288) R2.1@9.016,50.941 ; v1(10.241,41.9) 10.241,41.178 10.706,40.713 10.706,40.385 U1.B3@10.716,40.375 ; v1(11.216,30.568) 11.241,30.543 11.241,29.896 11.706,29.43 11.706,29.102 U2.B3@11.716,29.093 ; U1.C1@12.716,41.375 13.116,41.375 14.12,40.371 v1(15.097,40.371) ; C5.1@13.341,46.43 v1(14.454,46.43) ; v1(13.622,47.825) ADP1715.5@13.622,49.288 ADP1715.6@14.272,49.288 ; C8.1@13.835,35.431 15.06,35.431 15.141,35.512 v1(15.222,35.512) ; ADP1715.7@14.922,49.288 ADP1715.8@15.572,49.288 v1(15.572,47.825) ; C6.1@16.447,41.925 v1@16.447,42.992 ; C9.1@17.322,30.568 v1(17.322,31.613) ; v1(45.279,33.165) C2.1@46.53,33.165 ; v1@45.882,16.132 C10.1@45.882,17.058 ; v1(46.227,20.689) C11.1@46.227,21.897 ; v1(47.157,30.89) 49.899,30.89 49.965,30.955 U3.E5@49.972,30.949 ; v1(48.415,16.014) 50.356,16.014 50.684,16.342 50.684,16.686 50.962,16.964 51.634,16.964 U4.B3@52.159,17.489 ; v1(48.415,20.689) 49.959,20.689 U4.E5@50.159,20.489 ; v1(48.415,26.49) 50.185,26.49 50.513,26.818 50.513,27.162 50.791,27.44 51.463,27.44 U3.B3@51.988,27.965 ; U3.C1@53.988,28.965 55.214,28.965 v1(55.934,28.245) ; U4.C1@54.159,18.489 55.525,18.489 v1@56.125,17.889 ; v1(57.775,28.78) C3.1@57.775,29.965 ; v1(58.05,18.205) C12.1@58.05,19.489
  Bottom Layer w0.15: v1(26.284,9.815) v1@26.326,9.773 ; v1(26.32,14.77) v1@26.34,14.79 ; v1(26.368,38.947) v1@26.371,38.943 ; v1(26.368,40.175) v1@26.385,40.193 ; v1(26.405,19.82) v1@26.44,19.855 ; v1(26.405,23.705) v1@26.408,23.703 ; v1(26.405,24.92) v1@26.43,24.945 ; v1(26.405,28.87) v1@26.45,28.825 ; J7.C33@27.24,45.297 27.247,45.29 J7.C33@27.38,45.29 ; J7.C12@27.329,18.569 J7.C12@27.38,18.62 ; J7.C20@27.335,28.825 J7.C20@27.38,28.78 ; J7.C5@27.337,9.773 J7.C5@27.38,9.73 ; J7.C36@27.338,49.142 J7.C36@27.38,49.1 ; J7.C8@27.342,13.502 J7.C8@27.38,13.54 ; J7.C38@27.342,51.678 J7.C38@27.38,51.64 ; J7.C13@27.345,19.855 J7.C13@27.38,19.89 ; J7.C17@27.355,24.945 J7.C17@27.38,24.97 ; J7.C9@27.36,14.79 J7.C9@27.38,14.81 ; J7.C29@27.362,40.193 J7.C29@27.38,40.21 ; J7.C32@27.374,44.026 J7.C32@27.38,44.02 ; J7.C28@27.377,38.943 J7.C28@27.38,38.94 ; J7.C16@27.377,23.703 J7.C16@27.38,23.7 ; J7.D2@28.65,5.92 J7.D2@28.665,5.935 ; J7.D3@28.65,7.19 J7.D3@28.665,7.205 ; J7.D6@28.65,11 J7.D6@28.665,10.985 ; J7.D7@28.65,12.27 J7.D7@28.667,12.253 ; J7.D10@28.65,16.08 J7.D10@28.676,16.054 ; J7.D13@28.65,19.89 J7.D13@28.685,19.855 ; J7.D16@28.65,23.7 J7.D16@28.652,23.703 ; J7.D19@28.65,27.51 J7.D19@28.67,27.49 ; J7.D22@28.65,31.32 J7.D22@28.656,31.314 ; J7.D25@28.65,35.13 J7.D25@28.652,35.132 ; J7.D28@28.65,38.94 J7.D28@28.653,38.943 ; J7.D37@28.65,50.37 J7.D37@28.667,50.387 ; J7.D39@28.65,52.91 J7.D39@28.667,52.928 ; v1@29.54,16.054 v1(29.565,16.028) ; v1@29.6,10.985 v1(29.615,10.97) ; v1@29.61,19.855 v1(29.645,19.82) ; v1@29.626,27.49 v1(29.645,27.471) ; v1@29.629,50.387 v1(29.645,50.404) ; v1@29.628,52.928 v1(29.645,52.945) ; v1@29.635,5.935 v1(29.65,5.95) ; v1@29.639,31.314 v1(29.645,31.308) ; v1@29.642,38.943 v1(29.645,38.947) ; v1@29.643,23.703 v1(29.645,23.705) ; v1@29.643,35.132 v1(29.645,35.135) ; v1@29.648,12.253 v1(29.665,12.235) ; v1@29.65,7.205 v1(29.665,7.22) ; v1(31.465,4.62) v1@31.48,4.635 ; v1(31.52,8.481) v1@31.53,8.47 ; v1(31.52,9.801) v1@31.555,9.765 ; v1(31.52,21.177) v1@31.528,21.169 ; v1(31.52,32.587) v1@31.521,32.589 ; v1(31.52,44.032) v1@31.526,44.026 ; v1(31.52,47.87) v1@31.54,47.85 ; v1(31.549,17.28) v1@31.584,17.315 ; v1(31.615,54.17) v1@31.62,54.175 ; J7.G29@32.385,40.135 J7.G29@32.46,40.21 ; J7.G20@32.415,28.825 J7.G20@32.46,28.78 ; J7.G38@32.422,51.678 J7.G38@32.46,51.64 ; J7.G5@32.425,9.765 J7.G5@32.46,9.73 ; J7.G11@32.425,17.315 J7.G11@32.46,17.35 ; J7.G26@32.431,36.371 J7.G26@32.46,36.4 ; J7.G35@32.44,47.85 J7.G35@32.46,47.83 ; J7.G1@32.445,4.635 J7.G1@32.46,4.65 ; J7.G4@32.45,8.47 J7.G4@32.46,8.46 ; J7.G14@32.451,21.169 J7.G14@32.46,21.16 ; J7.G32@32.454,44.026 J7.G32@32.46,44.02 ; J7.G40@32.455,54.175 J7.G40@32.46,54.18 ; J7.G23@32.46,32.59 J7.G23@32.46,32.59 ; J7.H3@33.73,7.19 J7.H3@33.745,7.205 ; J7.H6@33.73,11 J7.H6@33.765,11.035 ; J7.H9@33.73,14.81 J7.H9@33.75,14.79 ; J7.H12@33.73,18.62 J7.H12@33.781,18.569 ; J7.H15@33.73,22.43 J7.H15@33.735,22.425 ; J7.H21@33.73,30.05 J7.H21@33.772,30.093 ; J7.H24@33.73,33.86 J7.H24@33.772,33.903 ; J7.H30@33.73,41.48 J7.H30@33.735,41.475 ; J7.H33@33.73,45.29 J7.H33@33.737,45.297 ; J7.H36@33.73,49.1 J7.H36@33.739,49.091 ; J7.H39@33.73,52.91 J7.H39@33.757,52.883 ; v1@34.58,11.035 v1(34.615,11.07) ; v1@34.61,22.425 v1(34.615,22.42) ; v1@34.633,33.903 v1(34.675,33.945) ; v1@34.665,18.569 v1(34.715,18.518) ; v1@34.666,49.091 v1(34.675,49.081) ; v1@34.668,45.297 v1(34.675,45.305) ; v1@34.67,41.475 v1(34.675,41.47) ; v1@34.695,14.79 v1(34.715,14.77) ; v1@34.7,7.205 v1(34.715,7.22) ; v1@35.096,37.67 v1(35.11,37.656)
  Bottom Layer w0.3: v1(26.284,4.65) J7.C1@27.38,4.65 ; v1(26.284,8.46) J7.C4@27.38,8.46 ; v1(26.32,13.54) 27.304,13.54 J7.C8@27.342,13.502 ; v1@26.326,9.773 J7.C5@27.337,9.773 ; v1@26.34,14.79 J7.C9@27.36,14.79 ; v1@26.371,38.943 J7.C28@27.377,38.943 ; v1@26.385,40.193 J7.C29@27.362,40.193 ; v1(26.405,18.62) 27.278,18.62 J7.C12@27.329,18.569 ; v1(26.406,45.29) 27.233,45.29 J7.C33@27.24,45.297 ; v1@26.408,23.703 J7.C16@27.377,23.703 ; v1(26.411,51.64) 27.304,51.64 J7.C38@27.342,51.678 ; v1(26.411,54.18) J7.C40@27.38,54.18 ; v1(26.42,30.05) J7.C21@27.38,30.05 ; v1@26.43,24.945 J7.C17@27.355,24.945 ; v1(26.43,49.1) 27.297,49.1 J7.C36@27.338,49.142 ; v1@26.44,19.855 J7.C13@27.345,19.855 ; v1@26.45,28.825 J7.C20@27.335,28.825 ; v1(26.623,44.249) 26.647,44.225 26.647,44.085 27.315,44.085 J7.C32@27.374,44.026 ; J7.D16@28.652,23.703 v1@29.643,23.703 ; J7.D25@28.652,35.132 v1@29.643,35.132 ; J7.D28@28.653,38.943 v1@29.642,38.943 ; J7.D22@28.656,31.314 v1@29.639,31.314 ; J7.D2@28.665,5.935 v1@29.635,5.935 ; J7.D3@28.665,7.205 v1@29.65,7.205 ; J7.D6@28.665,10.985 v1@29.6,10.985 ; J7.D37@28.667,50.387 v1@29.629,50.387 ; J7.D7@28.667,12.253 v1@29.648,12.253 ; J7.D39@28.667,52.928 v1@29.628,52.928 ; J7.D19@28.67,27.49 v1@29.626,27.49 ; J7.D10@28.676,16.054 v1@29.54,16.054 ; J7.D13@28.685,19.855 v1@29.61,19.855 ; v1@31.48,4.635 J7.G1@32.445,4.635 ; v1(31.52,40.21) 32.31,40.21 J7.G29@32.385,40.135 ; v1(31.52,51.64) 32.384,51.64 J7.G38@32.422,51.678 ; v1@31.521,32.589 J7.G23@32.46,32.59 ; v1(31.526,28.78) 32.37,28.78 J7.G20@32.415,28.825 ; v1@31.526,44.026 J7.G32@32.454,44.026 ; v1@31.528,21.169 J7.G14@32.451,21.169 ; v1@31.53,8.47 J7.G4@32.45,8.47 ; v1@31.54,47.85 J7.G35@32.44,47.85 ; v1(31.549,24.97) J7.G17@32.46,24.97 ; v1(31.549,36.371) J7.G26@32.431,36.371 ; v1@31.555,9.765 J7.G5@32.425,9.765 ; v1@31.584,17.315 J7.G11@32.425,17.315 ; v1(31.612,14.036) 31.693,14.036 32.124,13.605 32.395,13.605 J7.G8@32.46,13.54 ; v1@31.62,54.175 J7.G40@32.455,54.175 ; J7.H2@33.73,5.92 v1(34.715,5.92) ; J7.H18@33.73,26.24 v1(34.633,26.24) ; J7.H27@33.73,37.67 v1@35.096,37.67 ; J7.H15@33.735,22.425 v1@34.61,22.425 ; J7.H30@33.735,41.475 v1@34.67,41.475 ; J7.H33@33.737,45.297 v1@34.668,45.297 ; J7.H36@33.739,49.091 v1@34.666,49.091 ; J7.H3@33.745,7.205 v1@34.7,7.205 ; J7.H9@33.75,14.79 v1@34.695,14.79 ; J7.H39@33.757,52.883 33.802,52.928 34.658,52.928 v1(34.675,52.945) ; J7.H6@33.765,11.035 v1@34.58,11.035 ; J7.H21@33.772,30.093 v1(34.633,30.093) ; J7.H24@33.772,33.903 v1@34.633,33.903 ; J7.H12@33.781,18.569 v1@34.665,18.569
  Bottom Layer w0.5: J7.C25@27.26,35.13 27.353,35.037 27.353,33.887 J7.C24@27.38,33.86 ; J7.C25@27.38,35.13 J7.D25@28.65,35.13
  other v1: 6.4,37.957
NetADP1715_4: ADP1715.4 C14.2 R1.1 R2.2 | length 6.7
  Top Layer w0.15: R2.2@9.016,52.541 10.537,52.541 R1.1@10.566,52.513 10.566,53.838 ; C14.2@10.134,54.265 C14.2@10.226,54.358 10.566,54.018 10.566,53.838 ; ADP1715.4@13.622,53.838 10.566,53.838
NetJ7_D30: J7.D30 J7.D31 | length 1.3
  Bottom Layer w0.15: J7.D30@28.604,41.526 J7.D30@28.65,41.48 J7.D31@28.65,42.75
V3p3: ADP1715.1 ADP1715.2 C13.1 J7.C39 J7.D36 J7.D38 J7.D40 | length 9.3
  Top Layer w0.15: ADP1715.2@14.922,53.838 ADP1715.1@15.572,53.838 v1(17.105,53.838) 17.105,55.604 16.404,56.305 C13.1@16.404,56.355
  Top Layer w0.3: ADP1715.2@14.922,53.838 ADP1715.2@14.941,53.856
  Bottom Layer w0.15: v1(26.368,52.945) v1@26.403,52.91
  Bottom Layer w0.3: v1@26.403,52.91 J7.C39@27.38,52.91 ; J7.D36@28.65,49.1 v1(29.645,49.1) ; J7.D38@28.65,51.64 v1(29.626,51.64) ; J7.D40@28.65,54.18 v1(28.65,55.45)
Vmem_low: ADP1715.3 C1.2 C2.2 C3.2 C4.2 C5.2 C6.2 C7.2 C8.2 C9.2 C10.2 C11.2 C12.2 C15.2 R1.2 U1.B4 U1.D1 U1.E4 U2.B4 U2.D1 U2.E4 U3.B4 U3.D1 U3.E4 U4.B4 U4.D1 U4.E4 | length 58.3
  Top Layer w0.15: C5.2@11.717,46.407 C5.2@11.741,46.43 C5.2@11.741,46.38 ; C15.2@12.692,56.305 12.692,56.255 13.411,55.536 13.63,55.536 v1(13.716,55.45) 14.267,54.898 ADP1715.3@14.267,53.843 ; C9.2@15.597,30.543 C9.2@15.647,30.493 ; v1(47.185,15.8) v1@47.185,16.028 ; v1(47.279,26.645) 47.279,26.653 47.759,27.133 47.759,27.595 C1.2@47.935,27.77 ; C2.2@48.13,33.165 C2.2@48.23,33.065
  Top Layer w0.3: C4.2@6.392,40.82 v1(6.392,42.058) ; C4.2@6.692,40.839 C4.2@6.742,40.839 ; C4.2@6.754,40.85 9.247,40.85 U1.B4@9.716,40.381 ; v1(7.492,27.471) C7.2@7.492,28.693 7.567,28.618 10.241,28.618 U2.B4@10.716,29.093 ; U1.E4@9.716,43.375 9.716,44.355 C5.2@11.741,46.38 ; v1(10.561,46.407) C5.2@11.717,46.407 ; v1(10.566,49.288) R1.2@10.566,50.913 ; U2.E4@10.716,32.093 10.721,32.098 10.721,32.371 12.216,33.865 C8.2@12.216,35.431 ; v1(10.881,35.165) 10.963,35.165 11.229,35.431 C8.2@12.235,35.431 ; U1.D1@12.716,42.375 13.524,42.375 13.874,42.025 C6.2@14.747,42.025 ; U2.D1@13.716,31.093 14.072,31.093 14.622,30.543 C9.2@15.597,30.543 ; C6.2@14.847,41.925 v1(14.847,43.09) ; C9.2@15.647,30.493 v1(15.647,31.613) ; v1@47.185,16.028 47.482,16.326 C10.2@47.482,17.058 49.115,17.058 49.159,17.014 50.356,17.014 50.831,17.489 U4.B4@51.159,17.489 ; v1(47.435,20.689) 47.835,21.089 C11.2@47.835,21.905 49.744,21.905 U4.E4@51.159,20.489 ; C1.2@47.935,27.77 49.141,27.77 49.421,27.49 50.185,27.49 50.585,27.89 50.899,27.89 50.974,27.965 U3.B4@50.988,27.965 ; v1(48.13,32.054) C2.2@48.13,33.165 ; C2.2@48.23,33.065 49.223,33.065 50.988,31.3 U3.E4@50.988,30.965 ; U3.D1@53.988,29.965 C3.2@56.175,29.965 v1(56.175,31.075) ; U4.D1@54.159,19.489 C12.2@56.45,19.489 v1(56.45,20.689)
pads on no net: J7.C2 J7.C3 J7.C6 J7.C7 J7.C18 J7.C27 J7.C30 J7.C31 J7.C34 J7.C35 J7.C37 J7.D1 J7.D4 J7.D5 J7.D8 J7.D9 J7.D17 J7.D18 J7.D20 J7.D23 J7.D26 J7.D27 J7.D29 J7.D32 J7.D33 J7.D34 J7.D35 J7.G2 J7.G3 J7.G16 J7.G28 J7.G30 J7.G31 J7.G33 J7.G34 J7.G36 J7.G37 J7.G39 J7.H1 J7.H4 J7.H5 J7.H7 J7.H8 J7.H10 J7.H11 J7.H13 J7.H14 J7.H16 J7.H17 J7.H19 J7.H20 J7.H22 J7.H23 J7.H25 J7.H26 J7.H28 J7.H29 J7.H31 J7.H32 J7.H34 J7.H35 J7.H37 J7.H38 J7.H40 J7.MH1 J7.MH2 M1.1 M2.1 U1.A2 U1.A5 U1.B5 U1.C2 U1.C5 U2.A2 U2.A5 U2.B5 U2.C2 U2.C5 U3.A2 U3.A5 U3.B5 U3.C2 U3.C5 U4.A2 U4.A5 U4.B5 U4.C2 U4.C5

## Polygon pours and split planes (outlines as drawn)
Vmem_low on Top Layer "VMEM_LOW_L01_P000" (solid, remove dead copper, pour order 0): 0.65,58.15 40.034,58.15 42.194,55.989 42.194,40.521 44.569,38.146 55.299,38.146 62.03,31.415 61.98,31.365 61.98,12.38 60.392,10.792 39.023,10.792 39.023,5.451 36.958,3.386 23.861,3.386 23.861,9.428 0.65,32.639
GND on Bottom Layer "GND_L04_P001" (solid, remove dead copper, pour order 1): 0.708,58.005 40.092,58.005 42.252,55.845 42.252,40.376 44.627,38.001 55.357,38.001 62.088,31.27 62.038,31.22 62.038,12.235 60.45,10.647 39.081,10.647 39.081,5.306 37.016,3.241 23.919,3.241 23.919,9.283 0.708,32.494
GND on GND (split plane): 62.34,0.51 0.51,0.51 0.51,58.34 62.34,58.34
GND on GND (split plane): 47.24,5.977 47.011,5.977 47.011,6.434 47.24,6.434
Vmem_low on PWR (split plane): 62.34,0.51 0.51,0.51 0.51,58.34 14.573,58.34 14.573,52.544 14.58,52.492 14.6,52.443 14.632,52.401 18.692,48.342 18.733,48.31 18.782,48.29 18.834,48.283 30.461,48.283 30.513,48.29 30.562,48.31 30.604,48.342 30.636,48.384 30.656,48.432 30.663,48.485 30.663,51.141 30.663,53.93 30.663,58.34 62.34,58.34
Vmem_low on PWR (split plane): 2465 vertices, not listed, extent 43.012,6.176 46.777,9.942
V3p3 on PWR (split plane): 30.259,53.93 30.259,53.525 30.259,51.141 30.259,49.272 30.259,48.686 18.918,48.686 14.977,52.627 14.977,58.34 30.259,58.34

## Keep-outs
Keep-Out Layer:
  the board outline again, w1

## Other copper
PWR (plane layer: these items are gaps in the copper):
  lines w0.4: 14.775,58.85 14.775,52.544 18.834,48.485 30.461,48.485 ; 15.75,58.85 30.461,58.85 30.461,53.525 ; 30.461,51.141 30.461,48.485 ; 30.461,53.93 30.461,49.272 30.461,48.485

## Silkscreen, mask and mechanical layers (free items; w line width, h text height)
Top Overlay:
  text "DZ / IIS / D-ITET" at 48.743,38.146 h4 r90
  text "HyperRam" at 17.433,6.105 h2 r90
  text "4 X 512 Mbits" at 13.956,2.5 h2 r90
  text "PULP FMC / Sensor Board" at 8.05,1.1 h2 r90
Mechanical 4:
  lines w0: 0,0 62.85,0 62.85,58.83 0,58.83 0,0